# Altium PCB PCB1.PcbDoc
Units mm, origin at the board's own origin, x right, y up, seen from the top; angles counter-clockwise.
Board outline 48 x 29.5 mm, 2 copper layers (Top Layer, Bottom Layer); 7 components, 6 nets, 16 pads, 0 vias.
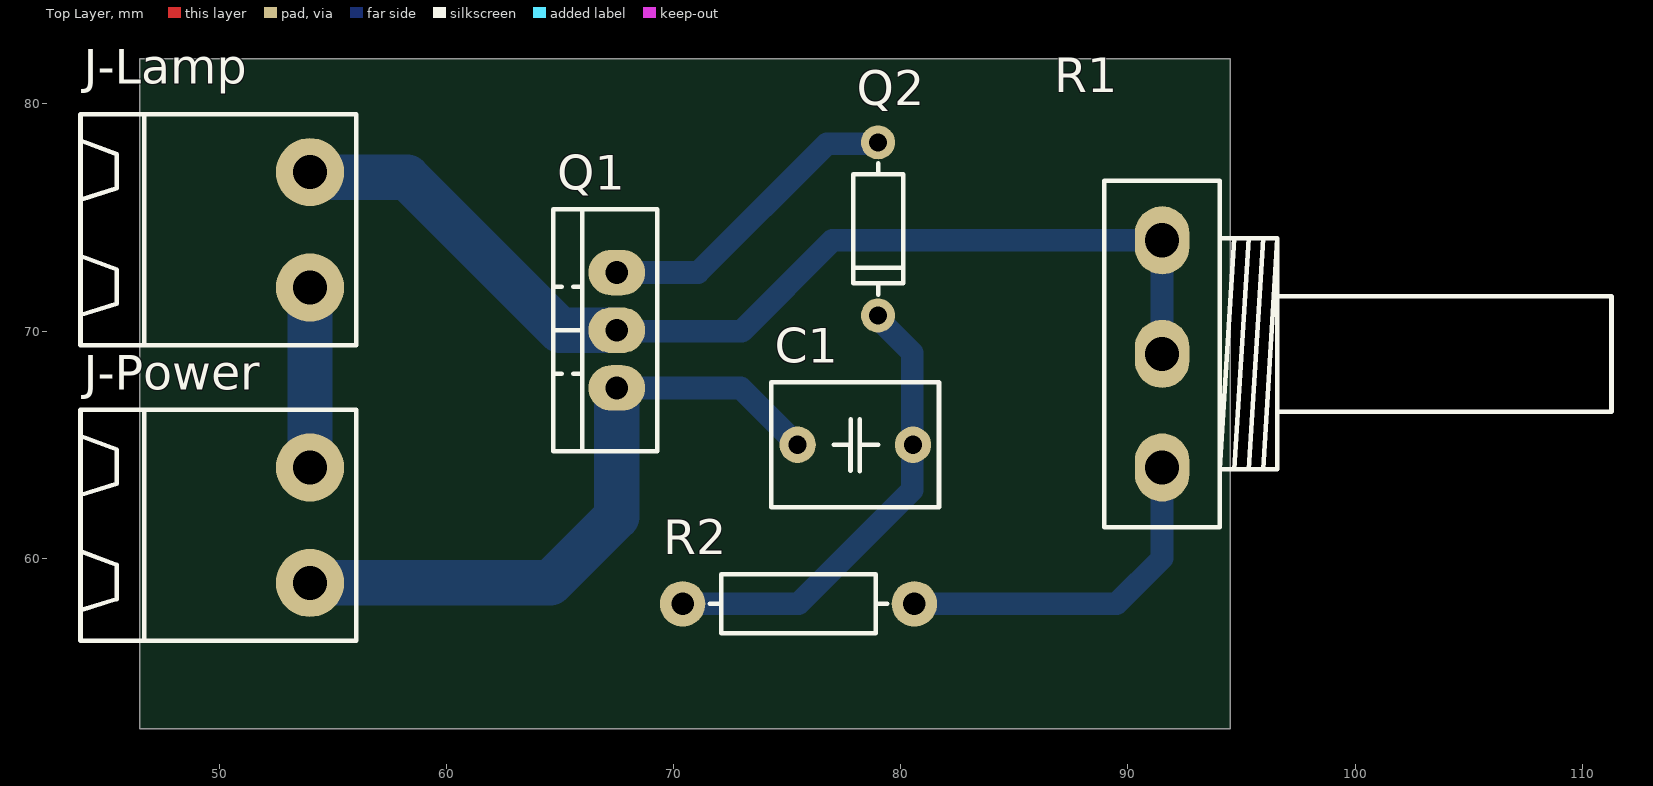
[diagram p0: Top Layer view]
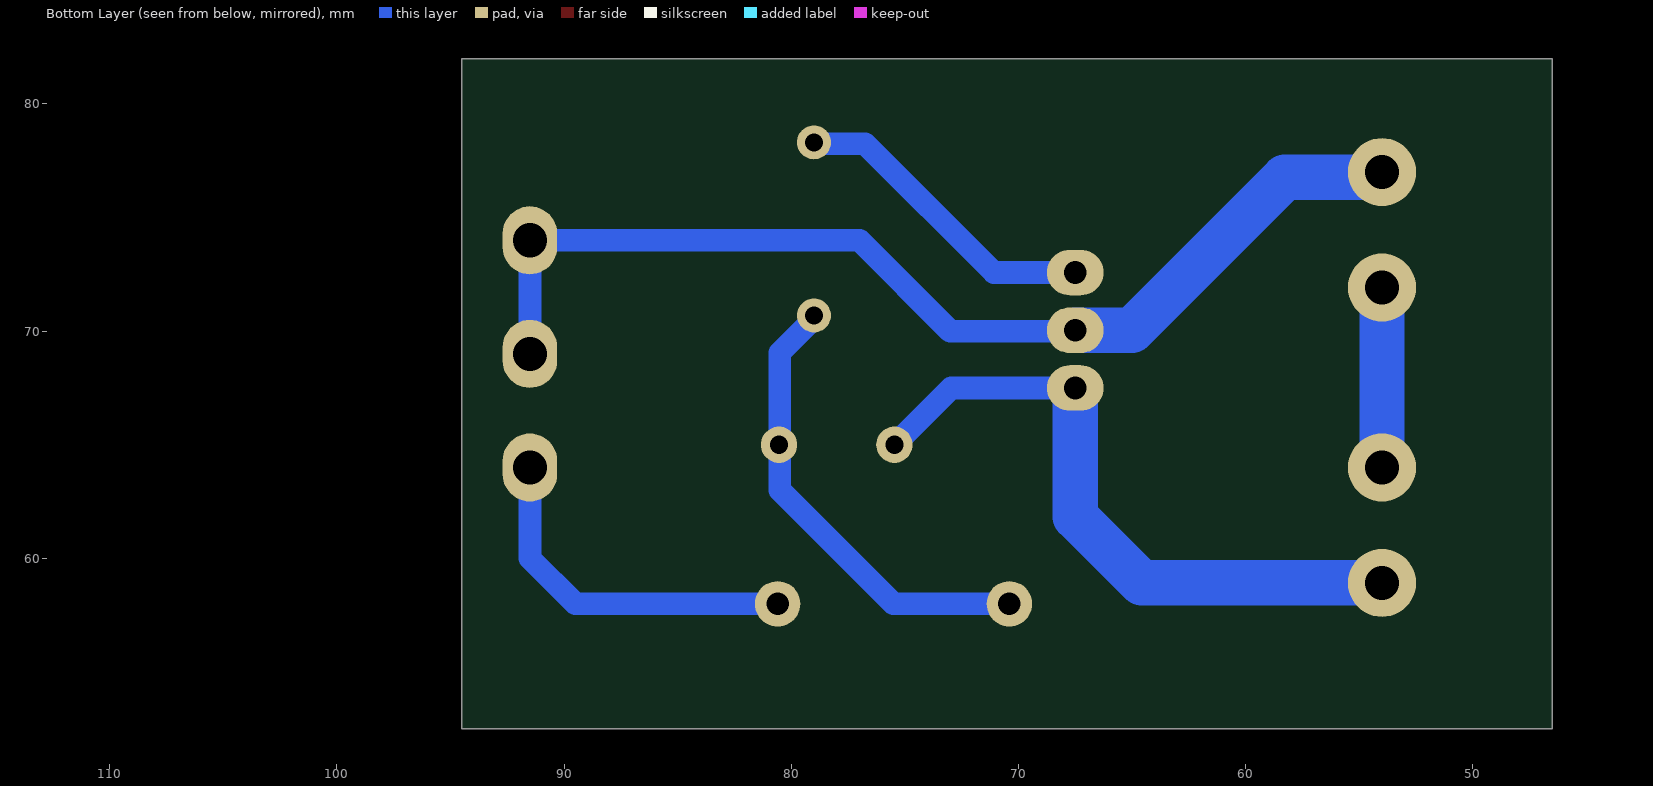
[diagram p1: Bottom Layer view, seen from below]

## Layer stack, top to bottom
Top Solder: solder mask 0.0102, Solder Resist, Dk 3.5
Top Layer: signal copper 0.0356
Dielectric 1: dielectric 0.32, FR-4, Dk 4.8
Bottom Layer: signal copper 0.0356
Bottom Solder: solder mask 0.0102, Solder Resist, Dk 3.5

## Board outline
46.5,52.5 94.5,52.5 94.5,82 46.5,82

## Design rules (kind name [scope] priority, off if disabled: settings)
Clearance [All] p1: gap=0.5 ignorepadtopadclearanceinfootprint=FALSE except(0: Arc-Hole Track-Hole SMDPad-Hole THPad-Hole Via-Hole Fill-Hole Poly-Hole Region-Hole Text-Hole; 1: Arc-Fill Arc-Poly Arc-Region Track-Fill Track-Poly Track-Region SMDPad-Fill SMDPad-Poly SMDPad-Region THPad-Fill THPad-Poly THPad-Region Via-Fill Via-Poly Via-Region Fill-Fill Fill-Poly Fill-Region Poly-Poly Poly-Region Region-Region)
PolygonConnect [All] p1: connectstyle=Relief reliefconductorwidth=0.254 reliefentries=4 polygonreliefangle="90 Angle" airgapwidth=0.254
RoutingVias [All] p1: holewidth=0.711 width=1.27 viastyle="Through Hole" minholewidth=0.711 minwidth=1.27 maxholewidth=0.711 maxwidth=1.27
SolderMaskExpansion [All] p1: expansion=0.102 istentingtop=FALSE
Width [All] p1: maxlimit=2 minlimit=0.5 preferedwidth=0.8
30 further rules are at their usual default settings.

## Components (designator, comment, footprint, x,y, rotation, side; value= is the part's Value field where it differs from the comment)
C1 "68nF" C_FLM_7X5H11 78,65 r180 top
J-Lamp "CONN_TB2" MSTB_2 54,74.46 r90 top
J-Power "CONN_TB2" MSTB_2 54,61.46 r90 top
Q1 "BTA12" TO220_3 67.5,70.04 r90 top
Q2 "DB3" D_AX03_DO35 79,74.5 r270 top
R1 "POT10K" VOL_R 91.5,69 r270 top
R2 "3.3K" R025W_AX04 75.5,58 r0 top

## Footprints (in the part's own frame and the unit in brackets; to place one, negate y for a bottom-side part, rotate by r counter-clockwise, add the part's x,y. Pads: shape width x height; smd on the part's side, far side on the other; paste and mask are expansions set on the pad)
C_FLM_7X5H11 [mm] "Capacitor, THT, Metallized Polyester Film with 7.2x5.5x11.5mm LxTxH"
  round 1.6 hole 0.8: 1(-2.54,0) 2(2.54,0)
  silkscreen extent -3.68,-2.75 3.7,2.75, body extent -3.6,-2.75 3.6,2.75, height 11.5
D_AX03_DO35 [mm] "DIODE 0.3 INCH SPACING DO35"
  round 1.5 hole 0.8: 1(-3.81,0) 2(3.81,0)
  silkscreen extent -2.89,-1.1 2.89,1.1, body extent -4.09,-0.96 4.09,0.96, height 1.96
MSTB_2 [mm] "PHOENIX MSTB 2, 5-G, 5.08mm pitch, 2pin"
  round 3 hole 1.5: 1(-2.54,0) 2(2.54,0)
  silkscreen extent -5.08,-2.03 5.08,10.1, body extent -5,-2 5,10, height 8.7
R025W_AX04 [mm] "RESISTOR 1/4 WATT, AXIAL0.4"
  round 2 hole 1: 1(-5.1,0) 2(5.1,0)
  silkscreen extent -3.9,-1.3 3.9,1.3, body extent -5.38,-1.28 5.38,1.28, height 2.6
TO220_3 [mm] "TO-220 3 LEAD, TO-262, pitch: 2.54mm  10x4.5mm"
  oval 2x2.5 hole 1: 1(-2.54,0) 2(0,0) 3(2.54,0)
  silkscreen extent -5.33,-1.78 5.33,2.79, body extent -5.2,-1.85 5.2,2.65, height 19
VOL_R [mm] "VOULME RIGHT ANGLE"
  oval 3x2.4 hole 1.5: 1(-5,0) 2(0,0) 3(5,0)
  silkscreen extent -7.62,-2.54 7.62,19.78, body extent -10.76,-5 10.93,27.8, height 24.54

## Part data
C1: library part CAP_THD_FLM, "CAP, THD, FILM,", ASSEMBLY=ASSEMBLY, DESC=DESCRIPTION, DIST#=MOUSER, MANF=MANF, MANF_P#=MANF_PART#, PARAM=20%, PARAM2=25V, PRICE="10= 5$"
J-Lamp J-Power: library part CONN_MSTB_2, "CONN, PHOENIX MSTB, 5-G, 5.08mm pitch", PARAM=12A, PARAM2=320V
Q1: library part TRIAC_BTA12-600_TO220, "Triac, 600V, 12A, TO-220", MANF=ST, MANF_P#="BTA12-600BW, BTA12-600CW, BTA12-600TW", PRICE=1200toman@PAYA
Q2: library part DIAC_DB3_DO35, "Diac, 32VBO, DO-35", MANF=ST, MANF_P#=DB3, PARAM="2A, -40~125oC", PARAM2=32VBO, PRICE=toman@PAYA
R1: library part RES_THD_POT_VOL, "RESISTOR, THD, Potentiometer Volume"
R2: library part RES_THD, "RESISTOR, THD", ASSEMBLY=ASSEMBLY, DESC=DESCRIPTION, DIST#=MOUSER, MANF="KOA SPEER", MANF_P#=RK73H1ETTP4701F, PARAM=0.063W, PARAM2=1%, PRICE="100= 0.5$"

## Nets (pads, with @x,y where several pads share a name; then routed paths per layer and width w, separated by ;. In a path a pad name is that pad's centre, name@x,y a point inside that pad or via, vN(x,y) a via of type N, cw(c..) or ccw(c..) an arc to the next point about the centre after c; other vN are vias at no path point)
L-Line: J-Lamp.1 J-Power.2 | length 7.5
  Bottom Layer w2: J-Power.2 J-Lamp.1@54,71.5
N-Line: C1.2 J-Power.1 Q1.1 | length 29.4
  Bottom Layer w1: Q1.1 72.96,67.5 C1.2
  Bottom Layer w2: J-Power.1 64.58,58.92 67.5,61.84 Q1.1
NetC1_1: C1.1 Q2.2 R2.1 | length 20.5
  Bottom Layer w1: R2.1 75.5,58 80.5,63 80.5,64.96 C1.1 80.5,65.04 80.5,69.055 79,70.555 Q2.2
NetQ1_3: Q1.3 Q2.1 | length 13.9
  Bottom Layer w1: Q1.3 71.08,72.58 76.75,78.25 78.94,78.25 Q2.1
NetR1_3: R1.3 R2.2 | length 15.7
  Bottom Layer w1: R2.2 89.5,58 91.5,60 R1.3
SCR-P1: J-Lamp.2 Q1.2 R1.1 R1.2 | length 47.2
  Bottom Layer w1: Q1.2 67.54,70 73,70 77,74 R1.1 R1.2
  Bottom Layer w2: J-Lamp.2@54,76.58 54,76.79 54.019,76.771 58.271,76.771 65.003,70.04 Q1.2